# EAGLE board circuit#2 (EAGLE 8.4.3)
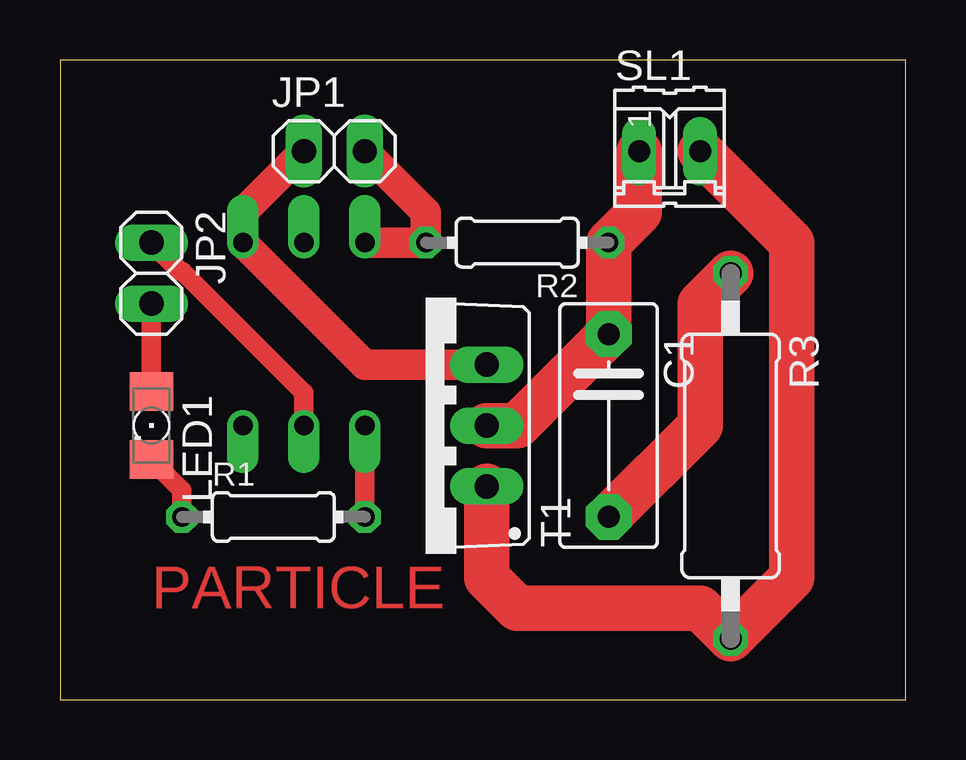
[diagram p0: board, top side]
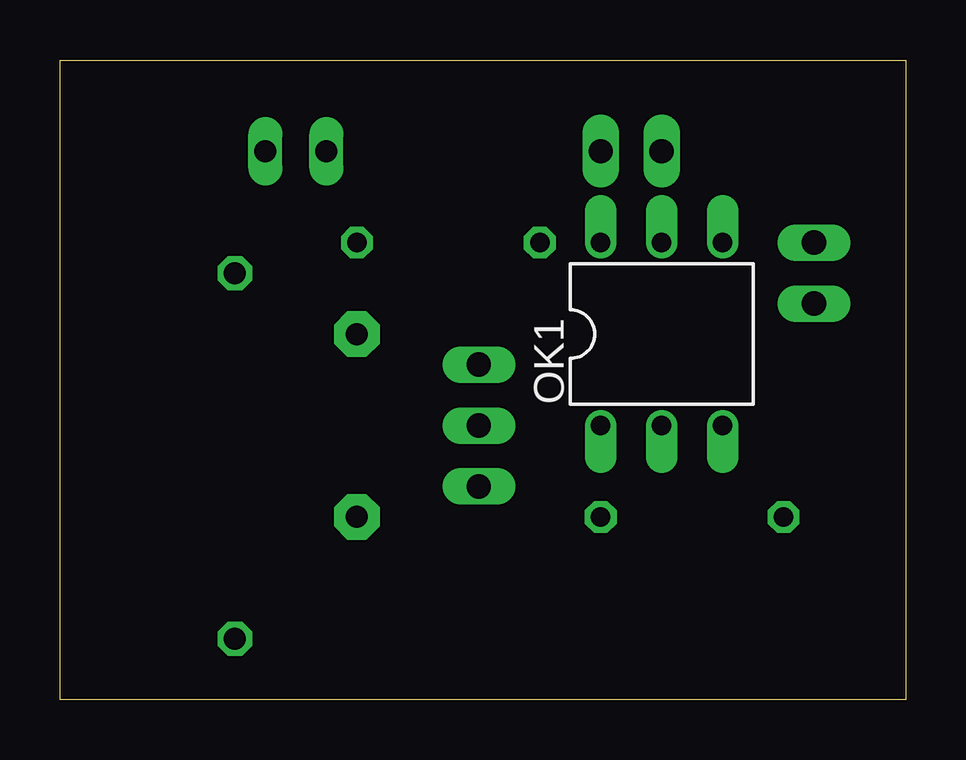
[diagram p1: board, bottom side, seen from below]

Size 35.23 x 26.66 mm. Coordinates in mm from the lower left corner, seen from the top.
Outline: 0,0 35.23,0 35.23,26.66 0,26.66 0,0
Copper layers (1*16): Top 0.035mm / dielectric 1.5mm / Bottom 0.035mm
Design rules "default": minimum track width 6mil, minimum drill 0.35mm, track to track 6mil, track to pad 6mil, pad to pad 6mil, via to via 6mil, smd to smd 6mil, copper to edge 40mil, drill to drill 6mil, minimum pad ring 10mil, minimum via ring 8mil, stop-mask expansion 4mil, vias tented up to drill 0mil, thermal gap 10mil

## Footprints (pad centres in the part's own frame; a part is rotated, then mirrored left to right if it is on the bottom)
C7.5B4 = drill 0.914 pad 1.905 octagon: 1 -3.81,0; 2 3.81,0
1X02 = drill 1.016 long: 1 -1.27,0; 2 1.27,0
LED_1206 = smd 1.6 x 1.803: A -1.422,0; C 1.422,0
DIL06 = drill 0.813 offset: 1 -2.54,-3.81; 2 0,-3.81; 3 2.54,-3.81; 4 2.54,3.81; 5 0,3.81; 6 -2.54,3.81
0204/7 = drill 0.813 octagon: 1 -3.81,0; 2 3.81,0
0411/15 = drill 0.914 octagon: 1 -7.62,0; 2 7.62,0
02P = drill 0.914 long: 1 -1.27,0; 2 1.27,0
TO220BV = drill 1.016 long: G 2.54,-2.54; T1 -2.54,-2.54; T2 0,-2.54

## Placement (x,y rotation side)
C1  [C7.5B4]  22.86,11.43 270 top
JP1  [1X02]  11.43,22.86 0 top
JP2  [1X02]  3.81,17.78 270 top
LED1  [LED_1206]  3.81,11.43 270 top
OK1  MOC3011M  [DIL06]  10.16,15.24 0 bottom
R1  [0204/7]  8.89,7.62 0 top
R2  [0204/7]  19.05,19.05 180 top
R3  [0411/15]  27.94,10.16 270 top
SL1  [02P]  25.4,22.86 0 top
T1  BT138-V  [TO220BV]  15.24,11.43 90 top

## Library data of the parts
C1 = capacitor-wima
JP1 JP2 = pinhead
LED1 = eagle-ltspice; SPICEMODEL: NONE; SPICEPREFIX: D; SPICETYPE: diode
OK1 = optocoupler; MF: FAIRCHILD SEMICONDUCTOR; MPN: MOC3011-M; OC_FARNELL: 1021363; OC_NEWARK: 72K8893
R1 R2 = eagle-ltspice; SPICEMODEL: NONE; SPICEPREFIX: R
R3 = resistor
SL1 = con-amp-quick; OC_FARNELL: unknown; OC_NEWARK: unknown
T1 = triac

## Nets
N$1: LED1.C R1.1
N$2: OK1.1 R1.2
N$3: JP2.2 LED1.A
N$4: JP2.1 OK1.2
N$5: JP1.2 OK1.6 R2.2
N$7: JP1.1 OK1.4 T1.G
N$8: R3.2 SL1.2 T1.T1
N$9: C1.2 R3.1
N$10: C1.1 R2.1 SL1.1 T1.T2

## Tracks (layer width: path | path; a pad name or v marks a point on that pad's centre or on a via)
N$1
  Top 0.813: LED1.C 5.08,8.74 R1.1
N$2
  Top 0.813: R1.2 OK1.1
N$3
  Top 0.813: JP2.2 LED1.A
N$4
  Top 0.813: JP2.1 5.03,17.83 5.12,17.83 10.16,12.79 OK1.2
N$5
  Top 1.27: OK1.6 R2.2 15.24,20.32 JP1.2
N$7
  Top 1.27: T1.G 12.7,13.97 OK1.4 7.62,20.32 JP1.1
N$8
  Top 1.905: T1.T1 17.78,5.08 19.05,3.81 26.67,3.81 R3.2 30.48,5.08 30.48,19.05 SL1.2
N$9
  Top 1.905: R3.1 26.67,16.51 26.67,11.43 C1.2
N$10
  Top 1.905: T1.T2 19.05,11.43 C1.1 R2.1 24.13,20.32 SL1.1

## Text on the board
Top: PARTICLE